# Altium PCB IAM_20380_BREAKOUT_BOARD.PcbDoc
Units mil, origin at the board's own origin, x right, y up, seen from the top; angles counter-clockwise.
Board outline 650 x 1100 mil, 2 copper layers (Top Layer, Bottom Layer); 3 components, 16 nets, 36 pads, 0 vias.
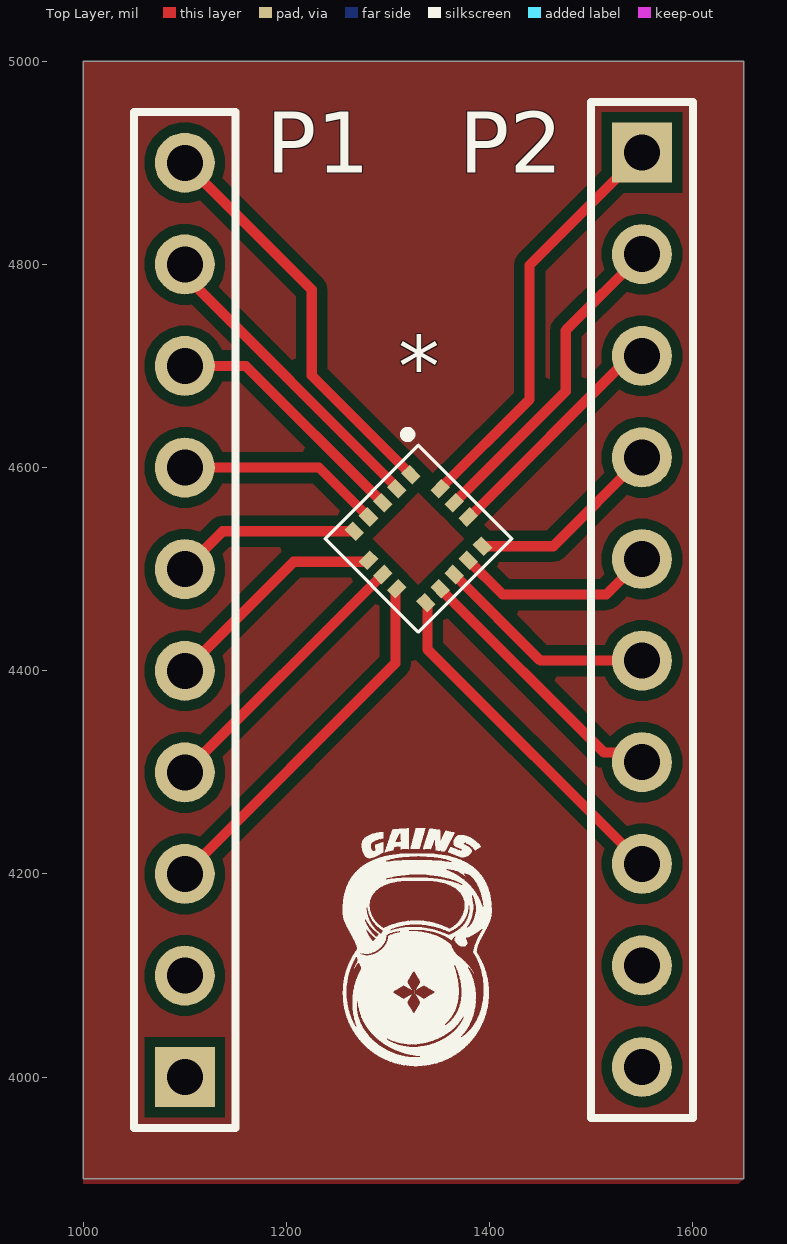
[diagram p0: Top Layer view]
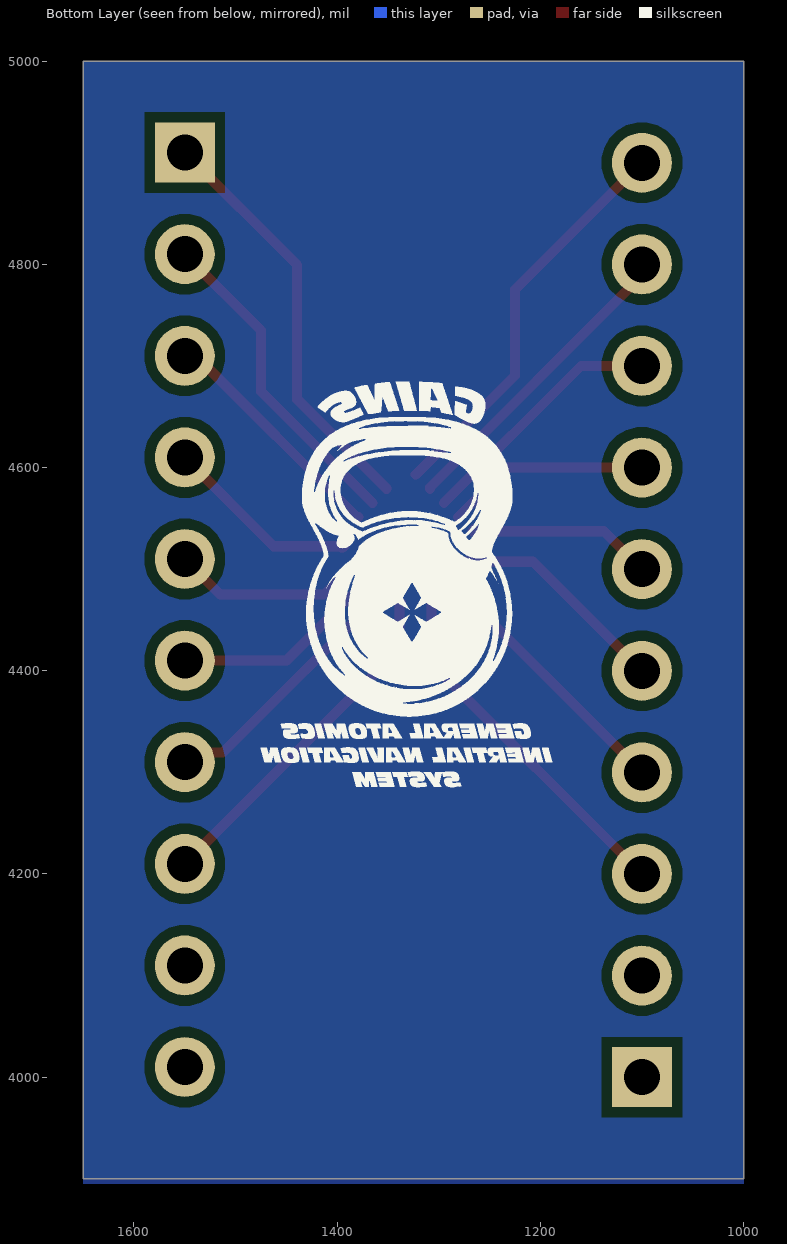
[diagram p1: Bottom Layer view, seen from below]

## Layer stack, top to bottom
Top Solder: solder mask 0.4, Solder Resist, Dk 3.5
Top Layer: signal copper 1.4
Dielectric 1: dielectric 12.6, FR-4, Dk 4.8
Bottom Layer: signal copper 1.4
Bottom Solder: solder mask 0.4, Solder Resist, Dk 3.5

## Board outline
1000,3900 1650,3900 1650,5000 1000,5000

## Design rules (kind name [scope] priority, off if disabled: settings)
Clearance [All] p1: gap=10 ignorepadtopadclearanceinfootprint=FALSE except(0: Arc-Hole Track-Hole SMDPad-Hole THPad-Hole Via-Hole Fill-Hole Poly-Hole Region-Hole Text-Hole)
PolygonConnect [All] p1: connectstyle=Relief reliefconductorwidth=10 reliefentries=4 polygonreliefangle="90 Angle" airgapwidth=10
RoutingVias [All] p1: holewidth=28 width=50 viastyle="Through Hole" minholewidth=28 minwidth=50 maxholewidth=28 maxwidth=50
SolderMaskExpansion [All] p1: expansion=4 istentingtop=FALSE
Width [All] p1: maxlimit=10 minlimit=10 preferedwidth=10
30 further rules are at their usual default settings.

## Components (designator, comment, footprint, x,y, rotation, side; value= is the part's Value field where it differs from the comment)
* "IAM-20380" "Gyro - IAM20380" 1330,4530 r315 top
P1 "Header 10" HDR1X10 1100,4000 r90 top
P2 "Header 10" HDR1X10 1550,4910 r270 top

## Footprints (in the part's own frame and the unit in brackets; to place one, negate y for a bottom-side part, rotate by r counter-clockwise, add the part's x,y. Pads: shape width x height; smd on the part's side, far side on the other; paste and mask are expansions set on the pad)
"Gyro - IAM20380" [mm]
  rect 0.4x0.3 smd mask+0.05: 1(-1.265,1) 2(-1.265,0.5) 3(-1.265,0) 4(-1.265,-0.5) 5(-1.265,-1) 9(1.265,-1) 10(1.265,-0.5) 11(1.265,0) 12(1.265,0.5) 13(1.265,1)
  rect 0.3x0.4 smd mask+0.05: 6(-0.5,-1.265) 7(0,-1.265) 8(0.5,-1.265) 14(0.5,1.265) 15(0,1.265) 16(-0.5,1.265)
  silkscreen extent -2.1,-1.65 1.65,1.72
HDR1X10 [mm] "Connector; Header; 10 Position"
  rect 1.5x1.5 hole 0.9: 1(0,0)
  round 1.5 hole 0.9: 2(2.54,0) 3(5.08,0) 4(7.62,0) 5(10.16,0) 6(12.7,0) 7(15.24,0) 8(17.78,0) 9(20.32,0) 10(22.86,0)
  silkscreen extent -1.27,-1.27 24.13,1.27

## Part data
*: "IAM-20380 High Performance Gyroscope"
P1 P2: "Header, 10-Pin", LatestRevisionDate=17-Jul-2002, LatestRevisionNote="Re-released for DXP Platform.", Publisher="Altium Limited"

## Nets (pads, with @x,y where several pads share a name; then routed paths per layer and width w, separated by ;. In a path a pad name is that pad's centre, name@x,y a point inside that pad or via, vN(x,y) a via of type N, cw(c..) or ccw(c..) an arc to the next point about the centre after c; other vN are vias at no path point)
Net*_1: *.1 P1.10 | length 399.2
  Top Layer w10: P1.10 1225,4775 1225,4690.68 *.1
Net*_2: *.2 P1.9 | length 307.3
  Top Layer w10: P1.9 1100,4789.12 1308.7,4580.42 *.2
Net*_3: *.3 P1.8 | length 250.6
  Top Layer w10: P1.8 1160,4700 *.3
Net*_4: *.4 P1.7 | length 201
  Top Layer w10: P1.7 1232.16,4600 *.4
Net*_5: *.5 P1.6 | length 183.6
  Top Layer w10: P1.6 1137.38,4537.38 1262.88,4537.38 1264.27,4538.77 1265.55,4538.77 *.5
Net*_6: *.6 P1.5 | length 225.9
  Top Layer w10: P1.5 1207.31,4507.31 1279.47,4507.31 *.6
Net*_7: *.7 P1.4 | length 275.5
  Top Layer w10: P1.4 *.7
Net*_8: *.8 P1.3 | length 367.3
  Top Layer w10: P1.3 1307.31,4407.31 1307.31,4479.47 *.8
Net*_9: *.9 P2.8 | length 345
  Top Layer w10: *.9 1338.77,4465.55 1338.77,4421.23 P2.8
Net*_10: *.10 P2.7 | length 269.5
  Top Layer w10: *.10 1512.78,4319.39 1540.61,4319.39 P2.7
Net*_11: *.11 P2.6 | length 219.9
  Top Layer w10: *.11 1450,4410 P2.6
Net*_12: *.12 P2.5 | length 199.3
  Top Layer w10: *.12 1412.84,4475 1515,4475 P2.5
Net*_13: *.13 P2.4 | length 194.3
  Top Layer w10: *.13 1394.45,4521.23 1395.73,4521.23 1397.12,4522.62 1462.62,4522.62 P2.4
Net*_14: *.14 P2.3 | length 236.6
  Top Layer w10: *.14 1380.42,4551.3 1539.12,4710 P2.3
Net*_15: *.15 P2.2 | length 321.3
  Top Layer w10: *.15 1475,4675 1475,4735 P2.2
Net*_16: *.16 P2.1 | length 413.2
  Top Layer w10: *.16 1439.4,4667.24 1439.4,4799.4 P2.1
pads on no net: P1.1 P1.2 P2.9 P2.10

## Polygon pours and split planes (outlines as drawn)
no net on Top Layer "NONET_L01_P000" (solid, pour order 0): 1000,5000 1650,5000 1650,3900 1645,3895 1000,3895
no net on Bottom Layer "NONET_L02_P001" (solid, pour order 1): 1000,5000 1650,5000 1650,3895 1000,3895

## Silkscreen, mask and mechanical layers (free items; w line width, h text height)
Top Overlay:
  drawing of 8 lines, arcs and shapes, not listed
Bottom Overlay:
  drawing of 44 lines, arcs and shapes, not listed